# Altium PCB PAYL0011 GMSK Prototyping Board no proto.PcbDoc
Units mil, origin at the board's own origin, x right, y up, seen from the top; angles counter-clockwise.
Board outline 3937.01 x 1968.5 mil, 2 copper layers (Top Layer, Bottom Layer); 57 components, 50 nets, 192 pads, 12 vias.
Unrouted connection lines stored in the file: 112.
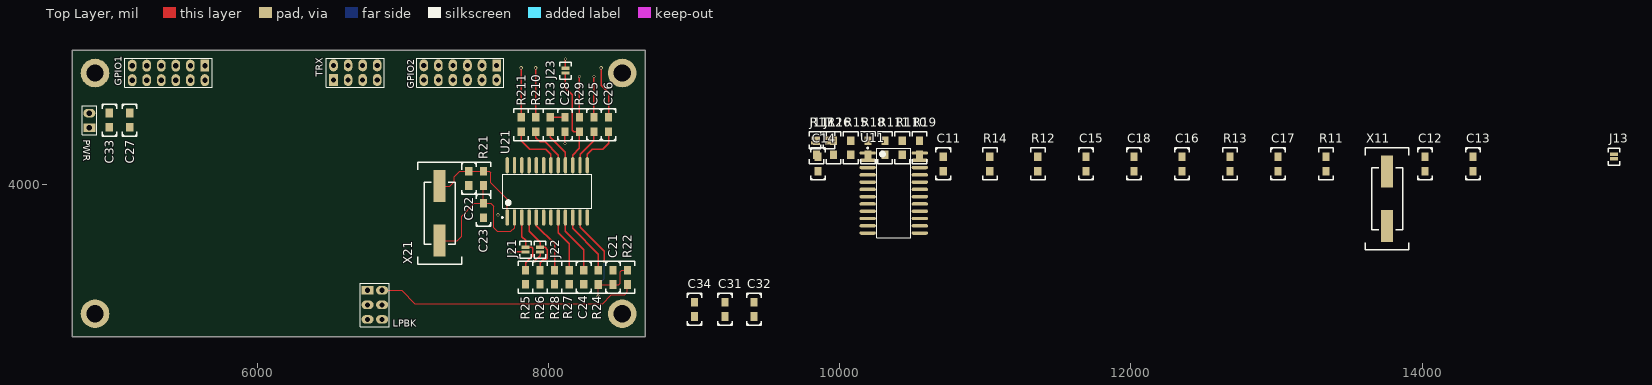
[diagram p0: Top Layer view]
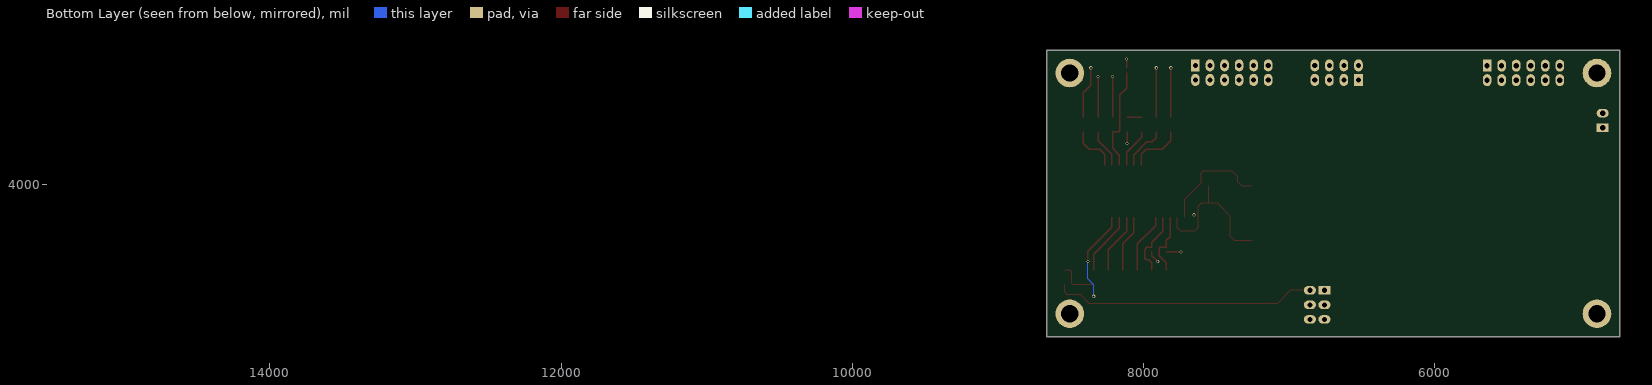
[diagram p1: Bottom Layer view, seen from below]

## Layer stack, top to bottom
Top Layer: signal copper 1.4
Dielectric: dielectric 12.6, FR-4, Dk 4.8
Bottom Layer: signal copper 1.4

## Board outline
4724.41,4921.26 8661.42,4921.26 8661.42,2952.76 4724.41,2952.76

## Design rules (kind name [scope] priority, off if disabled: settings)
Clearance [All] p1: gap=6
ComponentClearance [OnLayer('Top Layer') vs OnLayer('Top Layer')] p1: gap=3.94 collisioncheckmode=3 verticalgap=0 showdistances=FALSE
HoleSize [All] p1: absolutevalues=TRUE maxlimit=250 minlimit=11.81 maxpercent=80.000 minpercent=20.000
MinimumSolderMaskSliver [All] p1: minsoldermaskwidth=3.94
PasteMaskExpansion [All] p1: expansion=3.94
PolygonConnect [All] p1: connectstyle=Relief reliefconductorwidth=10 reliefentries=4 polygonreliefangle="90 Angle" airgapwidth=10
RoomDefinition S1 [InComponentClass('S1')] p1: confinementstyle=ConfineIn formatcopy=TRUE lockcomponents=FALSE outline 9780,3539.21 16330,3539.21 16330,4379.21 9780,4379.21
RoutingVias [All] p1: holewidth=13.78 width=21.65 viastyle="Through Hole" minholewidth=13.78 minwidth=21.65 maxholewidth=25.59 maxwidth=51.18
SilkscreenOverComponentPads [All] p1: minsilkscreentomaskgap=10
SolderMaskExpansion [All] p1: expansion=3.94
Width [All] p1: maxlimit=23.62 minlimit=7.87 preferedwidth=9.84
23 further rules are at their usual default settings.

## Classes and differential pairs
channel class "PAYL0010 GMSK Modem wo Proto": S1 S2
component class S2: C21 C22 C23 C24 C25 C26 C27 C28 J21 J22 J23 R21 R22 R23 R24 R25 R26 R27 R28 R29 R210 R211 U21 X21
component class "PAYL0012 GMSK Prototyping Board no proto": C31 C32 C33 C34 GPIO1 GPIO2 LPBK PWR TRX
component class S1: C1_S1 C2_S1 C3_S1 C4_S1 C5_S1 C6_S1 C7_S1 C8_S1 C11 C12 C13 C14 C15 C16 C17 C18 CBFR1_S1 D1_U1 D2_U1 D3_U1 D4_U1 D5_U1 D6_U1 D7_U1 D8_U1 J3_S1 J4_S1 J11 J12 J13 R6_S1 R10_S1 R11 R11_S1 R12 R13 R14 R15 R16 R17 R18 R19 R110 R111 RN1_S1 RN2_S1 RN3_S1 RN4_S1 U1_S1 U2_S1 U11 X1_S1 X11

## Components (designator, comment, footprint, x,y, rotation, side; value= is the part's Value field where it differs from the comment)
C11 "0805 Cap" "0805 Cap" 10710,4139.21 r90 top (schematic designator C1)
C12 "0805 Cap" "0805 Cap" 14020,4139.21 r90 top (schematic designator C2)
C13 "0805 Cap" "0805 Cap" 14350,4139.21 r90 top (schematic designator C3)
C14 "0805 Cap" "0805 Cap" 9850,4139.21 r90 top (schematic designator C4)
C15 "0805 Cap" "0805 Cap" 11690,4139.21 r90 top (schematic designator C5)
C16 "0805 Cap" "0805 Cap" 12350,4139.21 r90 top (schematic designator C6)
C17 "0805 Cap" "0805 Cap" 13010,4139.21 r90 top (schematic designator C7)
C18 "0805 Cap" "0805 Cap" 12020,4139.21 r90 top (schematic designator C8)
C21 "0805 Cap" "0805 Cap" 8440,3360 r90 top (schematic designator C1)
C22 "0805 Cap" "0805 Cap" 7450,4040 r90 top (schematic designator C2)
C23 "0805 Cap" "0805 Cap" 7550,3820 r90 top (schematic designator C3)
C24 "0805 Cap" "0805 Cap" 8240,3360.79 r90 top (schematic designator C4)
C25 "0805 Cap" "0805 Cap" 8310,4410 r270 top (schematic designator C5)
C26 "0805 Cap" "0805 Cap" 8410,4410 r90 top (schematic designator C6)
C27 "0805 Cap" "0805 Cap" 5120,4440 r90 top (schematic designator C7)
C28 "0805 Cap" "0805 Cap" 8110,4410 r90 top (schematic designator C8)
C31 "0805 Cap" "0805 Cap" 9210,3140 r90 top
C32 "0805 Cap" "0805 Cap" 9410,3140 r90 top
C33 "0805 Cap" "0805 Cap" 4980,4440 r270 top
C34 "0805 Cap" "0805 Cap" 9000,3140 r90 top
GPIO1 "Header 6X2" HDR2X6 5637.01,4814.57 r180 top
GPIO2 "Header 6X2" HDR2X6 7640.94,4816.54 r180 top
J11 "Jumper" "Solder Jumper C" 9828.31,4301.22 r90 top (schematic designator J1)
J12 "Jumper" "Solder Jumper C" 9924.92,4301.22 r90 top (schematic designator J2)
J13 "Jumper" "Solder Jumper C" 15320,4189.21 r90 top (schematic designator J3)
J21 "Jumper" "Solder Jumper C" 7840,3550 r270 top (schematic designator J1)
J22 "Jumper" "Solder Jumper C" 7940,3550 r90 top (schematic designator J2)
J23 "Jumper" "Solder Jumper C" 8114.21,4780 r270 top (schematic designator J3)
LPBK "Header 3X2" HDR2X3 6754.33,3270.87 r270 top
PWR "Header 2" HDR1X2 4842.52,4388.19 r90 top
R11 "0805 Resistor" "0805 Resistor" 13340,4139.21 r90 top (schematic designator R1)
R12 "0805 Resistor" "0805 Resistor" 11360,4139.21 r90 top (schematic designator R2)
R13 "0805 Resistor" "0805 Resistor" 12680,4139.21 r90 top (schematic designator R3)
R14 "0805 Resistor" "0805 Resistor" 11030,4139.21 r90 top (schematic designator R4)
R15 "0805 Resistor" "0805 Resistor" 10074.68,4250.28 r90 top (schematic designator R5)
R16 "0805 Resistor" "0805 Resistor" 9956.81,4250.28 r90 top (schematic designator R6)
R17 "0805 Resistor" "0805 Resistor" 9838.94,4250.28 r90 top (schematic designator R7)
R18 "0805 Resistor" "0805 Resistor" 10192.56,4250.28 r90 top (schematic designator R8)
R19 "0805 Resistor" "0805 Resistor" 10546.18,4250.28 r90 top (schematic designator R9)
R21 "0805 Resistor" "0805 Resistor" 7550,4040 r90 top (schematic designator R1)
R22 "0805 Resistor" "0805 Resistor" 8540,3360 r270 top (schematic designator R2)
R23 "0805 Resistor" "0805 Resistor" 8010,4410 r270 top (schematic designator R3)
R24 "0805 Resistor" "0805 Resistor" 8340,3360 r270 top (schematic designator R4)
R25 "0805 Resistor" "0805 Resistor" 7840,3360.79 r90 top (schematic designator R5)
R26 "0805 Resistor" "0805 Resistor" 7940,3360.79 r90 top (schematic designator R6)
R27 "0805 Resistor" "0805 Resistor" 8140,3360.79 r90 top (schematic designator R7)
R28 "0805 Resistor" "0805 Resistor" 8040,3360.79 r90 top (schematic designator R8)
R29 "0805 Resistor" "0805 Resistor" 8210,4410 r270 top (schematic designator R9)
R110 "0805 Resistor" "0805 Resistor" 10428.31,4250.28 r90 top (schematic designator R10)
R111 "0805 Resistor" "0805 Resistor" 10310.43,4250.28 r90 top (schematic designator R11)
R210 "0805 Resistor" "0805 Resistor" 7910,4410 r270 top (schematic designator R10)
R211 "0805 Resistor" "0805 Resistor" 7810,4410 r270 top (schematic designator R11)
TRX "Header 4X2" HDR2X4 6520.47,4716.54 r0 top
U11 "CMX589A GMSK Modem" "SOIC24 - GMSK MODEM" 10370,3939.21 r0 top (schematic designator U1)
U21 "CMX589A GMSK Modem" "SOIC24 - GMSK MODEM" 7989.21,3950.79 r90 top (schematic designator U1)
X11 "HC49 Crystal" HC49 13760,3899.21 r90 top (schematic designator X1)
X21 "HC49 Crystal" HC49 7250,3800 r270 top (schematic designator X1)

## Footprints (in the part's own frame and the unit in brackets; to place one, negate y for a bottom-side part, rotate by r counter-clockwise, add the part's x,y. Pads: shape width x height; smd on the part's side, far side on the other; paste and mask are expansions set on the pad)
"0805 Cap" [mm]
  rect 1.5x1.25 smd: 1(1.25,0) 2(-1.25,0)
  silkscreen extent -2.79,-1.27 2.79,1.27, body extent -1.55,-0.63 1.55,0.63, height 1
"0805 Resistor" [mm]
  rect 1.5x1.25 smd: 1(1.25,0) 2(-1.25,0)
  silkscreen extent -2.79,-1.27 2.79,1.27, body extent -1.55,-0.63 1.55,0.63, height 1
HC49 [mm]
  rect 5.6x2.1 smd: 1(-4.75,0) 2(4.75,0)
  silkscreen extent -8.89,-3.81 8.89,3.81, body extent -5.4,-2.7 5.4,2.7, height 4.2
HDR1X2 [mm]
  rect 1.5x2.1 hole 0.91: 1(0,0)
  oval 1.5x2.1 hole 0.91: 2(2.54,0)
  silkscreen extent -1.27,-1.27 3.81,1.27, body extent -1.17,-1.17 3.71,1.17, height 7.01
HDR2X3 [mm]
  rect 1.5x2.1 hole 0.91: 1(0,0)
  oval 1.5x2.1 hole 0.91: 2(0,2.54) 3(2.54,0) 4(2.54,2.54) 5(5.08,0) 6(5.08,2.54)
  silkscreen extent -1.27,-1.27 6.35,3.81, body extent -1.17,-1.17 6.25,3.71, height 7.01
HDR2X4 [mm]
  rect 1.5x2.1 hole 0.91: 1(0,0)
  oval 1.5x2.1 hole 0.91: 2(0,2.54) 3(2.54,0) 4(2.54,2.54) 5(5.08,0) 6(5.08,2.54) 7(7.62,0) 8(7.62,2.54)
  silkscreen extent -1.27,-1.27 8.89,3.81, body extent -1.17,-1.17 8.79,3.71, height 7.01
HDR2X6 [mm]
  rect 1.5x2.1 hole 0.91: 1(0,0)
  oval 1.5x2.1 hole 0.91: 2(0,2.54) 3(2.54,0) 4(2.54,2.54) 5(5.08,0) 6(5.08,2.54) 7(7.62,0) 8(7.62,2.54) 9(10.16,0) 10(10.16,2.54) 11(12.7,0) 12(12.7,2.54)
  silkscreen extent -1.27,-1.27 13.97,3.81, body extent -1.18,-1.18 13.87,3.72, height 7.01
"SOIC24 - GMSK MODEM" [mm]
  oval 2.85x0.6 smd: 1(-4.55,6.985) 2(-4.55,5.715) 3(-4.55,4.445) 4(-4.55,3.175) 5(-4.55,1.905) 6(-4.55,0.635) 7(-4.55,-0.635) 8(-4.55,-1.905) 9(-4.55,-3.175) 10(-4.55,-4.445) 11(-4.55,-5.715) 12(-4.55,-6.985) 13(4.55,-6.985) 14(4.55,-5.715) 15(4.55,-4.445) 16(4.55,-3.175) 17(4.55,-1.905) 18(4.55,-0.635) 19(4.55,0.635) 20(4.55,1.905) 21(4.55,3.175) 22(4.55,4.445) 23(4.55,5.715) 24(4.55,6.985)
  silkscreen extent -4.67,-7.8 2.97,7.96, body extent -5.38,-7.79 5.38,7.79, height 2.67
"Solder Jumper C" [mm]
  rect 0.6x1.4 smd: 1(0.4,0) 2(-0.4,0)
  silkscreen extent -1.5,-1 1.5,1

## Part data
C11 C12 C13 C18 C21 C22 C23 C28: library part "0805 MLCC - NP0, 5%", "0805 MLCC - NP0, 5%"
C14 C15 C16 C17 C24 C25 C26 C27 C31 C32 C33 C34: library part "0805 MLCC - X7R, 10%", "0805 MLCC - X7R, 10%"
GPIO1 GPIO2: "Header, 6-Pin, Dual row"
J11 J12 J13 J21 J22 J23: library part "Solder Bridge", "Solder Bridge"
LPBK: "Header, 3-Pin, Dual row"
PWR: "Header, 2-Pin"
R11 R12 R13 R14 R15 R16 R17 R18 R19 R21 R22 R23 R24 R25 R26 R27 R28 R29 R110 R111 R210 R211: library part "0805 Thin Film Resistor 0.1%", "0805 Thin Film Resistor 0.1%"
TRX: "Header, 4-Pin, Dual row"
U11 U21: library part CMX589A

## Free pads (board coordinates)
  round 196.85 hole 118.11: SCR1(4881.89,4763.78) SCR2(8503.94,4763.78) SCR3(4881.89,3110.24) SCR4(8503.94,3110.24)

## Via types
v1: diameter 21.65, hole 13.78, Top Layer to Bottom Layer, 12 vias

## Nets (pads, with @x,y where several pads share a name; then routed paths per layer and width w, separated by ;. In a path a pad name is that pad's centre, name@x,y a point inside that pad or via, vN(x,y) a via of type N, cw(c..) or ccw(c..) an arc to the next point about the centre after c; other vN are vias at no path point)
BT_S1: J13.1 R19.1 U11.15
BT_S2: J23.1 R29.1 U21.15 | length 716.4
  Top Layer w10: J23.1 8114.21,4660 8160,4614.21 8160,4370.79 8170,4360.79 R29.1 8210,4245.79 8164.21,4200 U21.15
CDIVA_S1: J11.2 R15.1 U11.3
CDIVA_S2: J21.2 R25.1 U21.3 | length 439.7
  Top Layer w10: U21.3 7814.21,3640 7840,3614.21 J21.2 7884.25,3565.75 7890,3560 7890,3510 7840,3460 R25.1
CDIVB_S1: J12.1 R16.1 U11.4
CDIVB_S2: J22.1 R26.1 U21.4 | length 466.2
  Top Layer w10: U21.4 7864.21,3675.79 7940,3600 J22.1 7974.25,3565.75 7990,3550 7990,3490 7980,3480 7960,3480 7940,3460 R26.1
GND: C12.2 C13.2 C14.2 C15.2 C16.1 C17.2 C18.2 C22.2 C23.2 C24.2 C25.2 C26.1 C27.2 C28.2 C31.2 C32.2 C33.1 C34.1 GPIO1.11 GPIO2.11 J11.1 J12.2 J13.2 J21.1 J22.2 J23.2 pad.SCR1 pad.SCR2 pad.SCR3 pad.SCR4 PWR.1 R18.2 R28.2 R111.2 R211.2 TRX.2 TRX.4 TRX.6 TRX.8 U11.12 U21.12 | length 1308.9
  Top Layer w10: v1(7740,3534.25) J21.1 ; R211.2 v1(7810,4800) ; v1(7900,3470) 7940,3510 J22.2 ; v1(8110,4280) 8110,4300 C28.2 ; J23.2 v1(8114.21,4860) ; C25.2 v1(8310,4740) ; v1(8360,4800) 8360,4680 8410,4630 C26.1
NetC12_1: C12.1 R11.1 U11.1 X11.1
NetC13_1: C13.1 R11.2 U11.2 X11.2
NetC14_1: C14.1 U11.9
NetC15_1: C15.1 U11.14
NetC16_2: C16.2 U11.13
NetC22_1: C22.1 R21.1 U21.1 X21.1 | length 770.7
  Top Layer w7.87: X21.1 7320,3987.01 7350,4017.01 7350,4050 7389.21,4089.21 C22.1 R21.1 7590,4089.21 7600,4079.21 7600,4010 7714.21,3895.79 U21.1
NetC23_1: C23.1 R21.2 U21.2 X21.2 | length 1071.4
  Top Layer w7.87: X21.2 7370,3612.99 7400,3642.99 7400,3780 7489.21,3869.21 C23.1 ; R21.2 C23.1 ; U21.2 7764.21,3700 7740,3675.79 7644.21,3675.79 7620,3700 7620,3849.21 7600,3869.21 C23.1
NetC24_1: C24.1 U21.9 | length 413.8
  Top Layer w10: U21.9 8114.21,3675.79 8240,3550 C24.1
NetC25_1: C25.1 U21.14 | length 270.5
  Top Layer w10: U21.14 8214.21,4204.21 8310,4300 C25.1
NetC26_2: C26.2 U21.13 | length 332.3
  Top Layer w10: U21.13 8264.21,4204.21 8300,4240 8370,4240 8410,4280 C26.2
NetR13_1: R13.1 U11.16
NetR23_1: R23.1 U21.16 | length 274
  Top Layer w10: R23.1 8010,4324.21 8114.21,4220 U21.16
PLLACQ1: GPIO1.12 U11.7
PLLACQ2: GPIO2.12 U21.7
RX1: LPBK.5 R12.1 TRX.3
RX2: LPBK.2 R22.1 TRX.7 | length 1807.2
  Top Layer w7.87: LPBK.2 6989.13,3270.87 7080,3180 8370,3180 8430,3240 8520,3240 8540,3260 R22.1
RX_PSAVE1: GPIO1.7 R17.1 U11.8
RX_PSAVE2: GPIO2.7 R27.1 U21.8 | length 393
  Top Layer w10: U21.8 8064.21,3665.79 8140,3590 R27.1
RX_S/N1: GPIO1.6 U11.23
RX_S/N2: GPIO2.6 U21.23
RXACQ1: GPIO1.9 U11.6
RXACQ2: GPIO2.9 U21.6
RXCLK1: GPIO1.4 U11.21
RXCLK2: GPIO2.4 U21.21
RXDATA1: GPIO1.3 U11.20
RXDATA2: GPIO2.3 U21.20
RXFB_S1: C11.1 R14.2 U11.10
RXFB_S2: C21.1 R24.2 U21.10 | length 435.3
  Top Layer w10: U21.10 8164.21,3695.79 8340,3520 R24.2
RXHOLD1: GPIO1.10 R18.1 U11.5
RXHOLD2: GPIO2.10 R28.1 U21.5 | length 413.8
  Top Layer w10: U21.5 7914.21,3715.79 8040,3590 R28.1
RXIN_S1: C11.2 R12.2 R14.1 U11.11
RXIN_S2: C21.2 R22.2 R24.1 U21.11 | length 994.9
  Top Layer w7.87: v1(8340,3230) R24.1 C21.2 8480.79,3310.79 8490,3320 8490,3399.21 8500,3409.21 R22.2
  Top Layer w10: U21.11 8214.21,3705.79 8380,3540 v1(8380,3470)
  Bottom Layer w7.87: v1(8340,3230) 8340,3310 8380,3350 v1(8380,3470)
TX1: C18.1 LPBK.1 R13.2 TRX.1
TX2: C28.1 LPBK.6 R23.2 TRX.5 | length 100
  Top Layer w11.81: R23.2 C28.1
TX_PSAVE1: GPIO1.8 R111.1 U11.18
TX_PSAVE2: GPIO2.8 R211.1 U21.18 | length 379.9
  Top Layer w10: R211.1 7810,4300 7870,4240 7980,4240 8014.21,4205.79 U21.18
TXCLK1: GPIO1.2 U11.22
TXCLK2: GPIO2.2 U21.22
TXDATA1: GPIO1.1 U11.19
TXDATA2: GPIO2.1 U21.19
TXEN1: GPIO1.5 R110.1 U11.17
TXEN2: GPIO2.5 R210.1 U21.17 | length 314.8
  Top Layer w10: R210.1 7910,4320 7940,4290 7974.21,4290 8064.21,4200 U21.17
VCC: C17.1 C27.1 C31.1 C32.1 C33.2 C34.2 PWR.2 R15.2 R16.2 R17.2 R19.2 R25.2 R26.2 R27.2 R29.2 R110.2 R210.2 U11.24 U21.24 | length 621.6
  Top Layer w10: R210.2 v1(7910,4800) ; R29.2 v1(8210,4740)
pads on no net: LPBK.3 LPBK.4
copper on no net:
  other v1: 7650,3790